# Altium PCB Layout.PcbDoc
Units mm, origin at the board's own origin, x right, y up, seen from the top; angles counter-clockwise.
Board outline 47 x 66 mm, 4 copper layers (Top Layer, Ground Layer, Power Layer, Bottom Layer), stack 1.591 mm thick; 60 components, 39 nets, 195 pads, 68 vias.
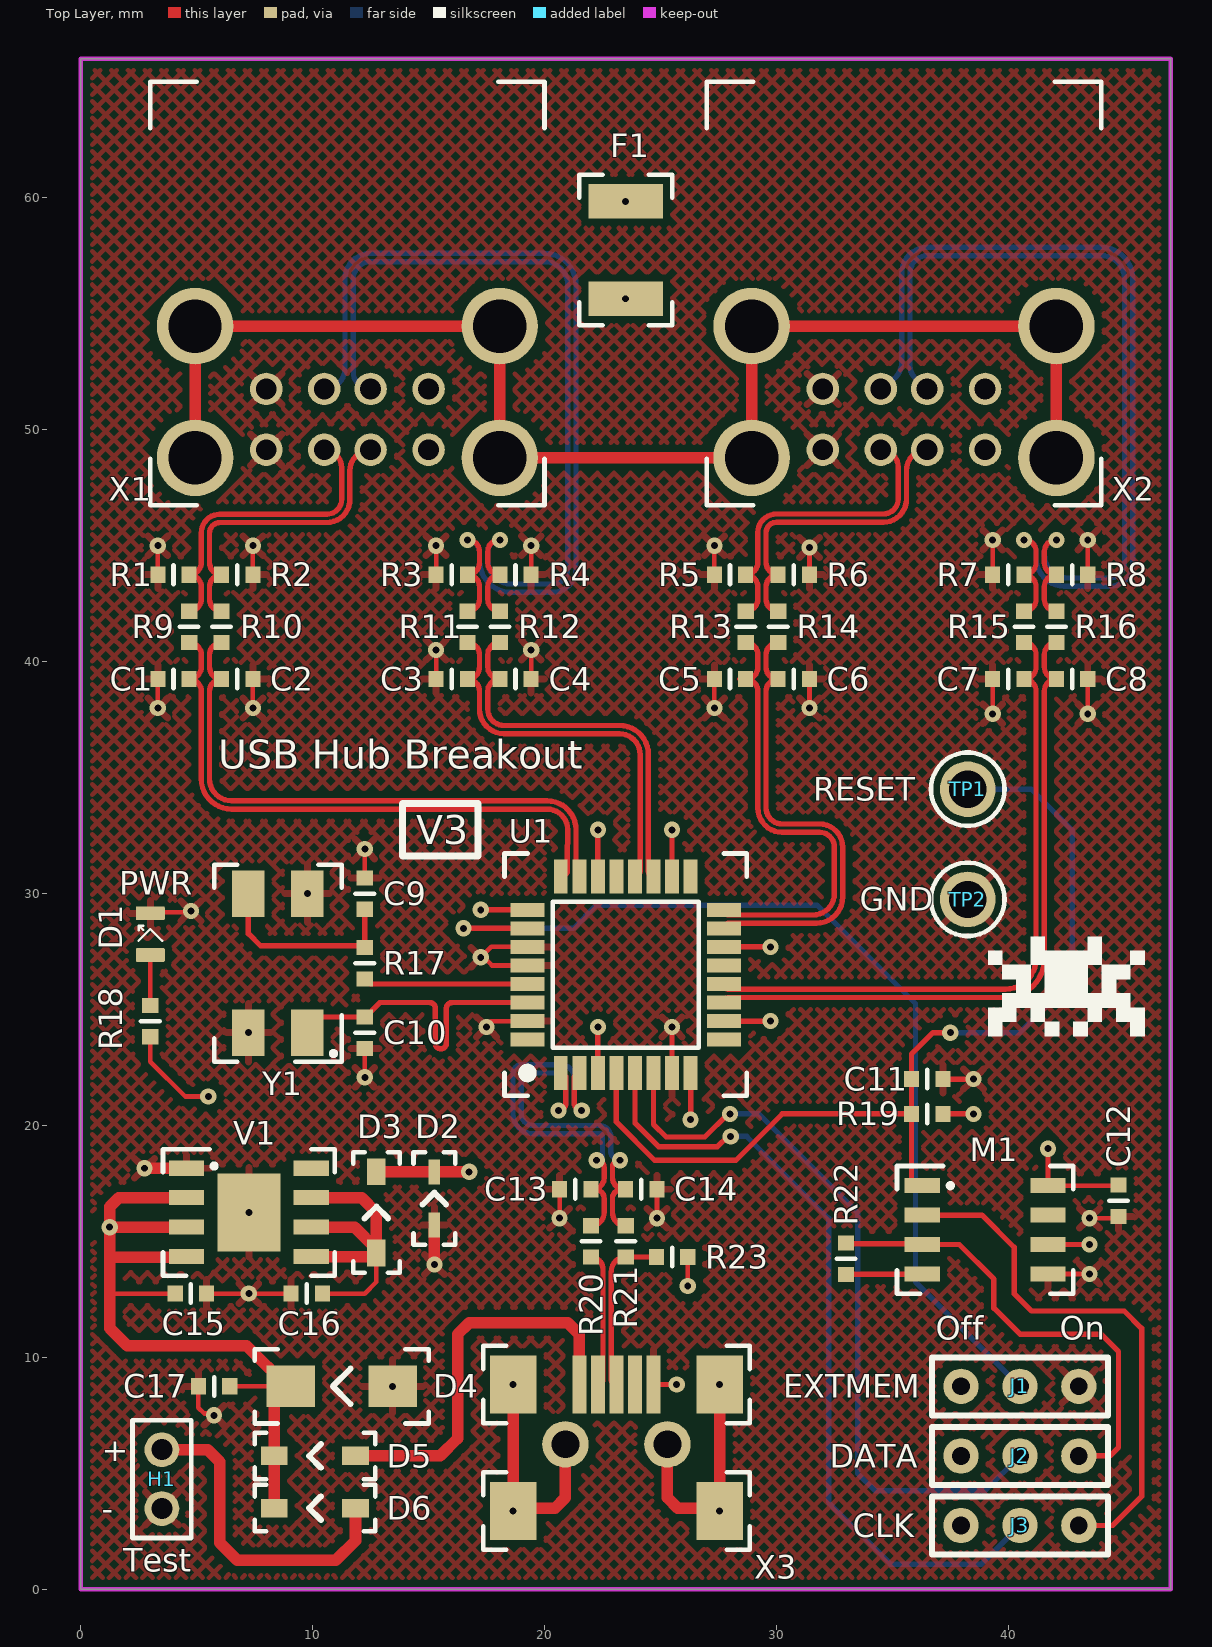
[diagram p0: Top Layer view]
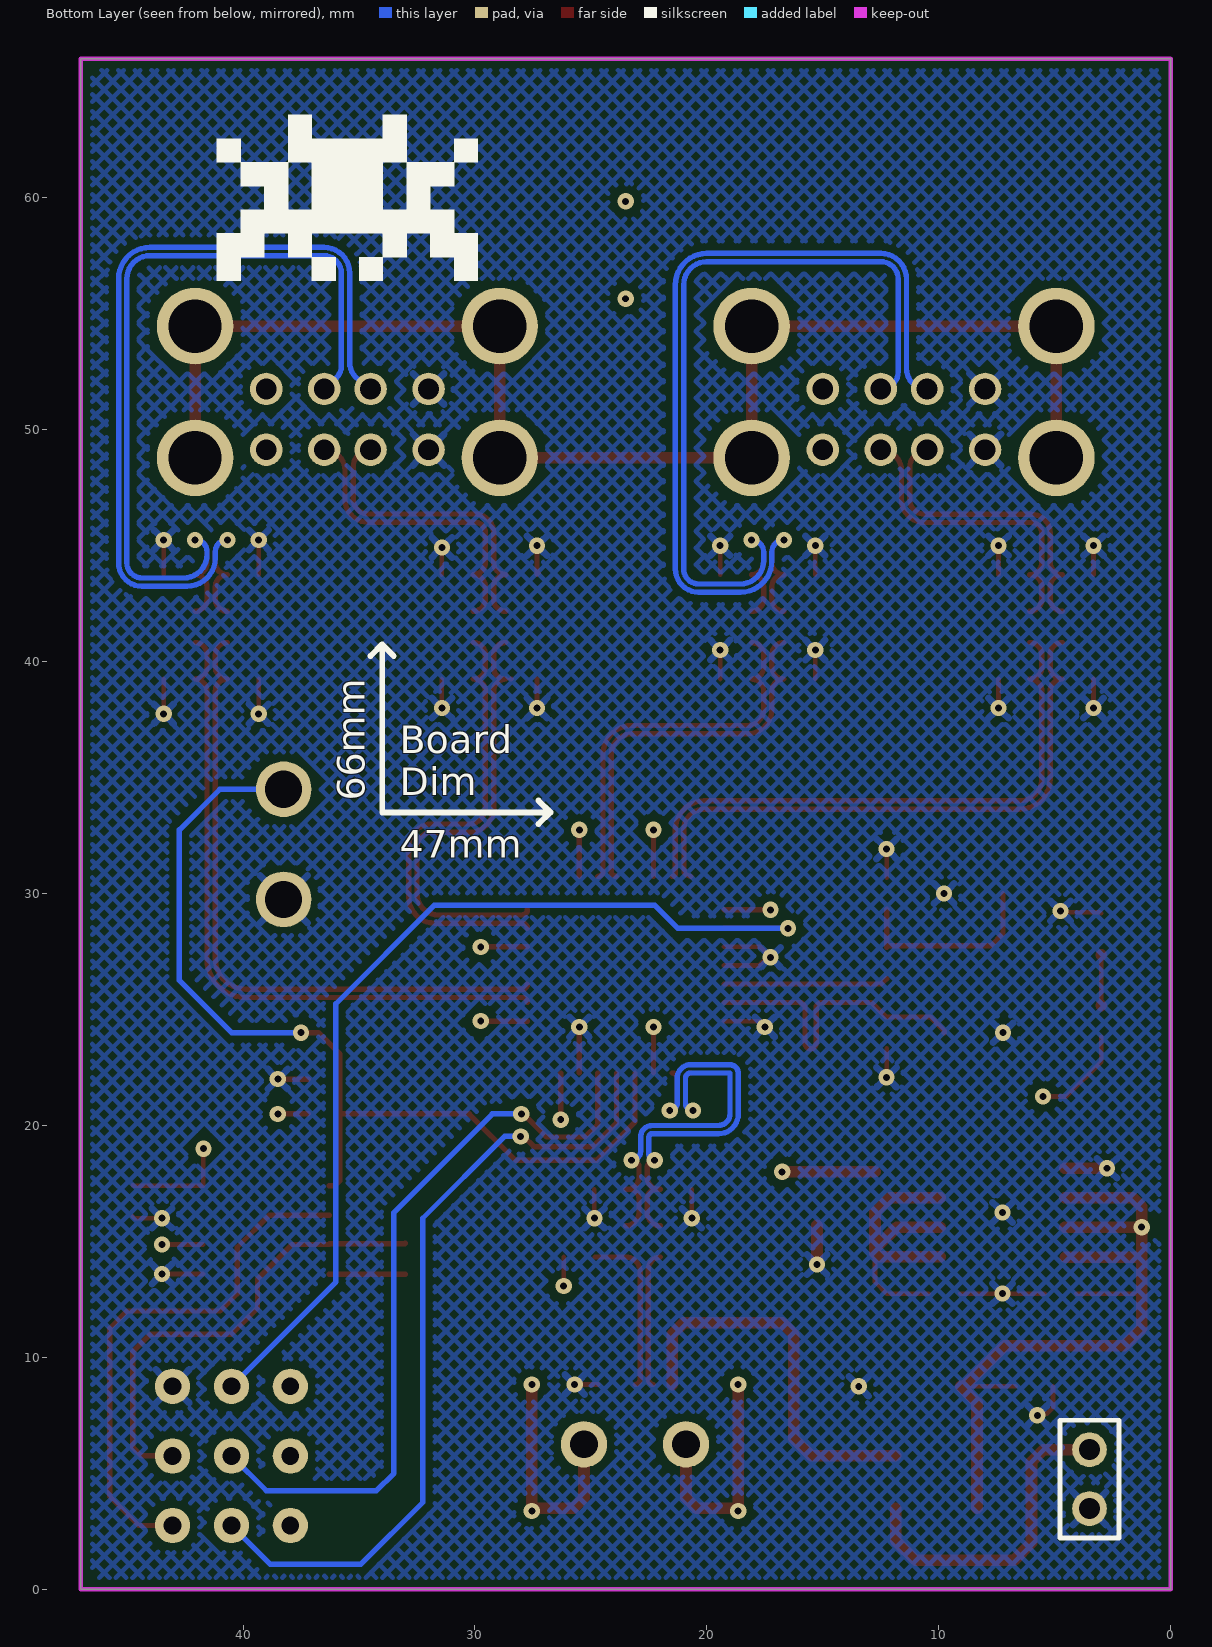
[diagram p1: Bottom Layer view, seen from below]
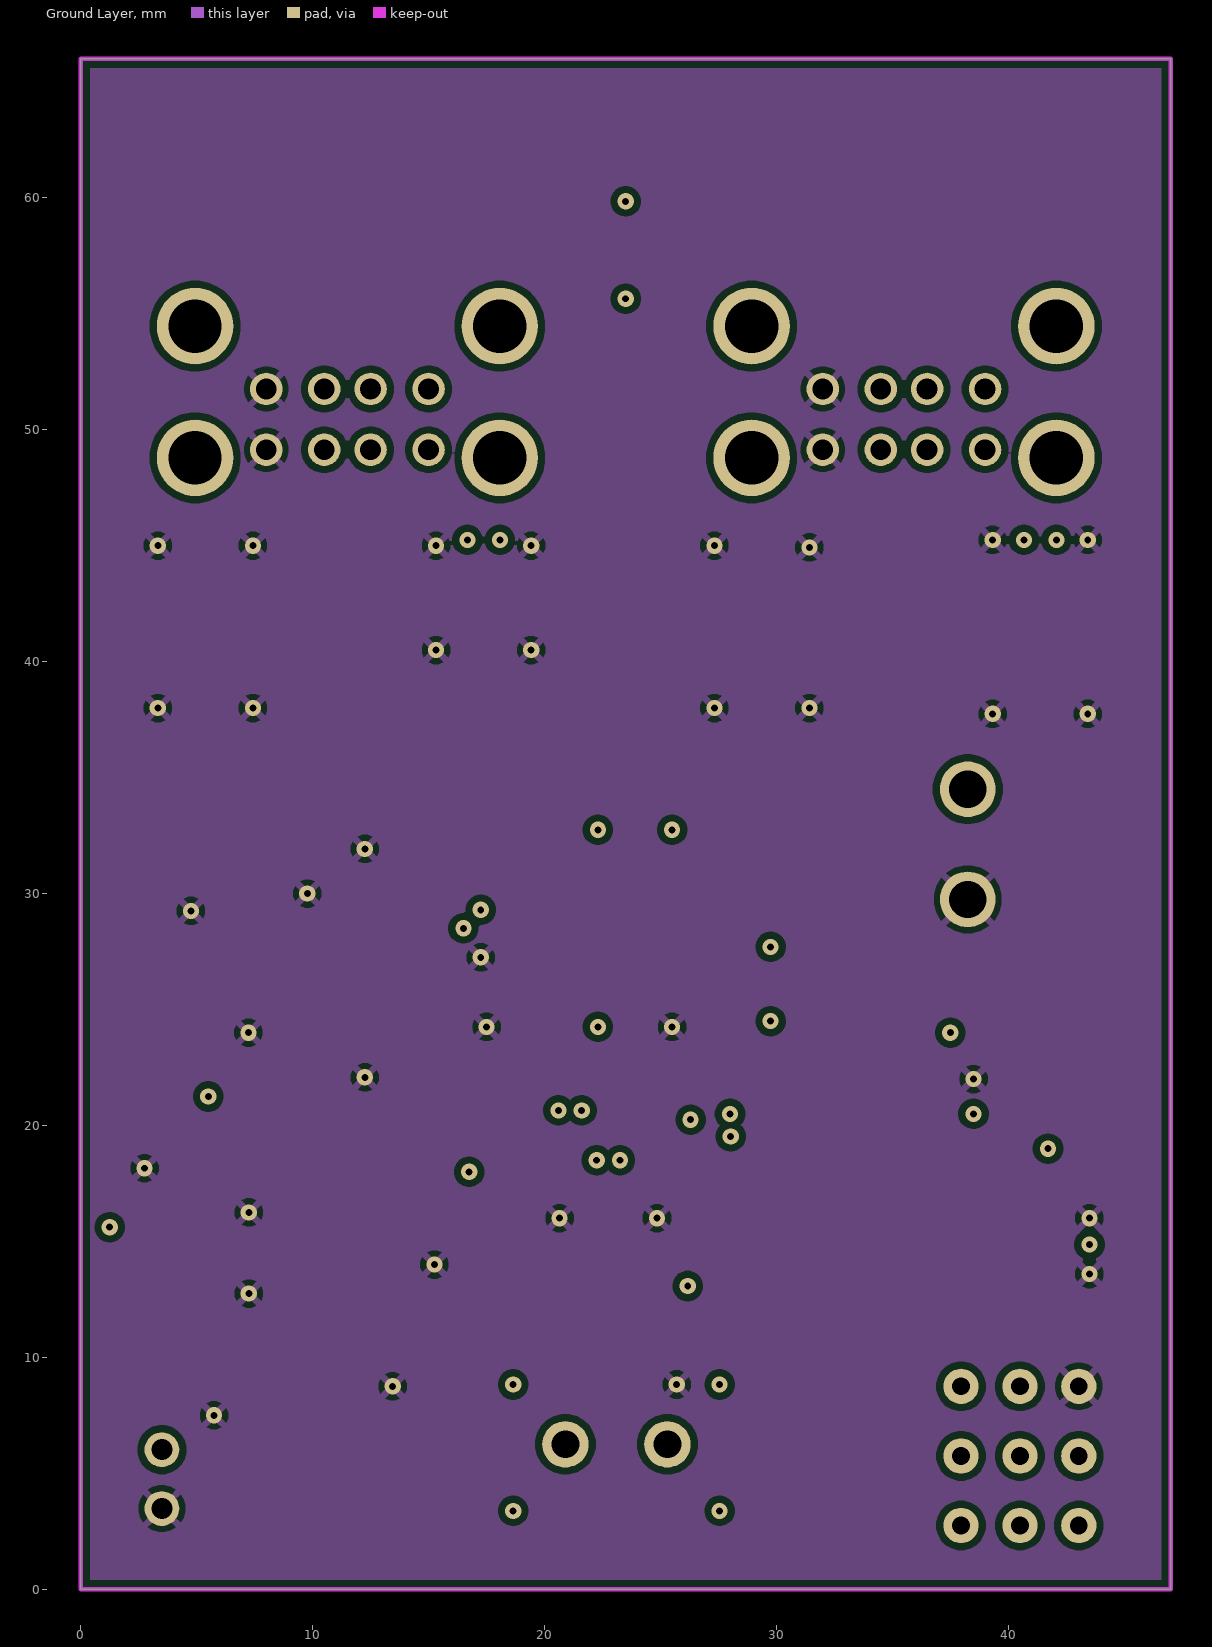
[diagram p2: Ground Layer]
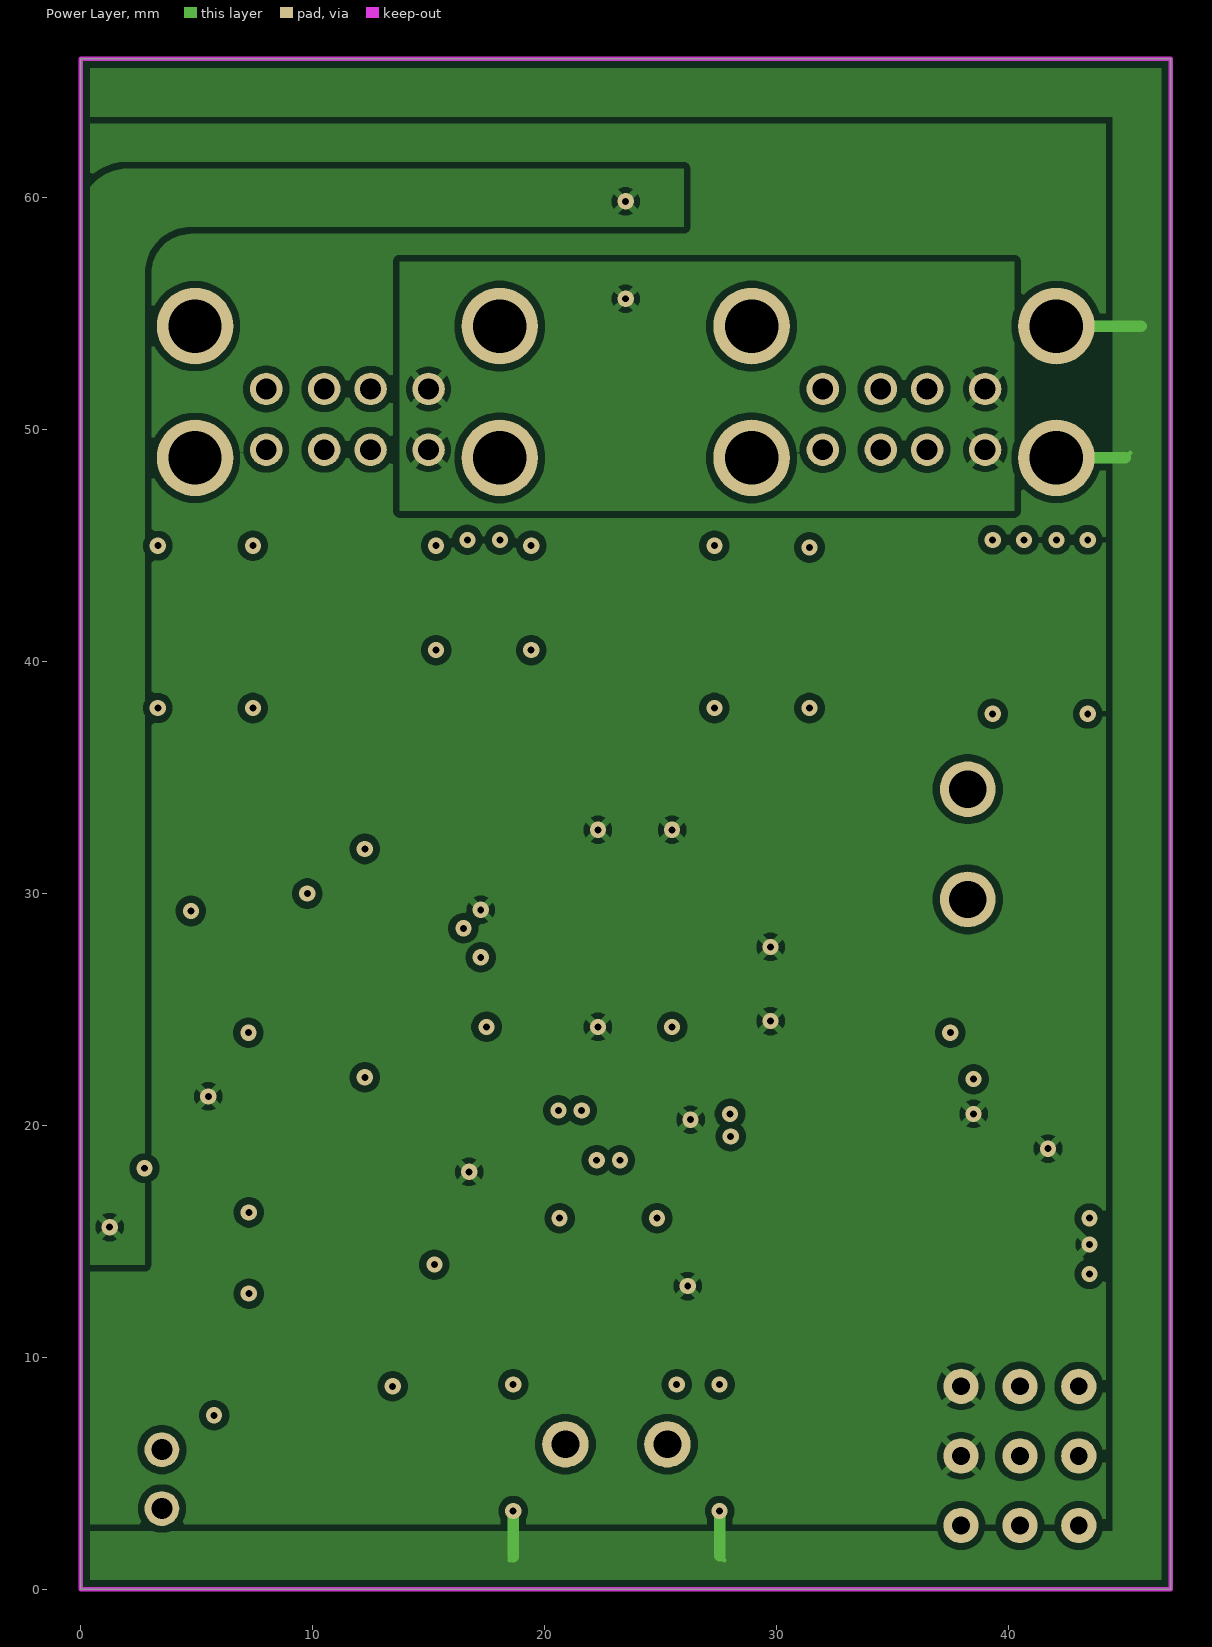
[diagram p3: Power Layer]
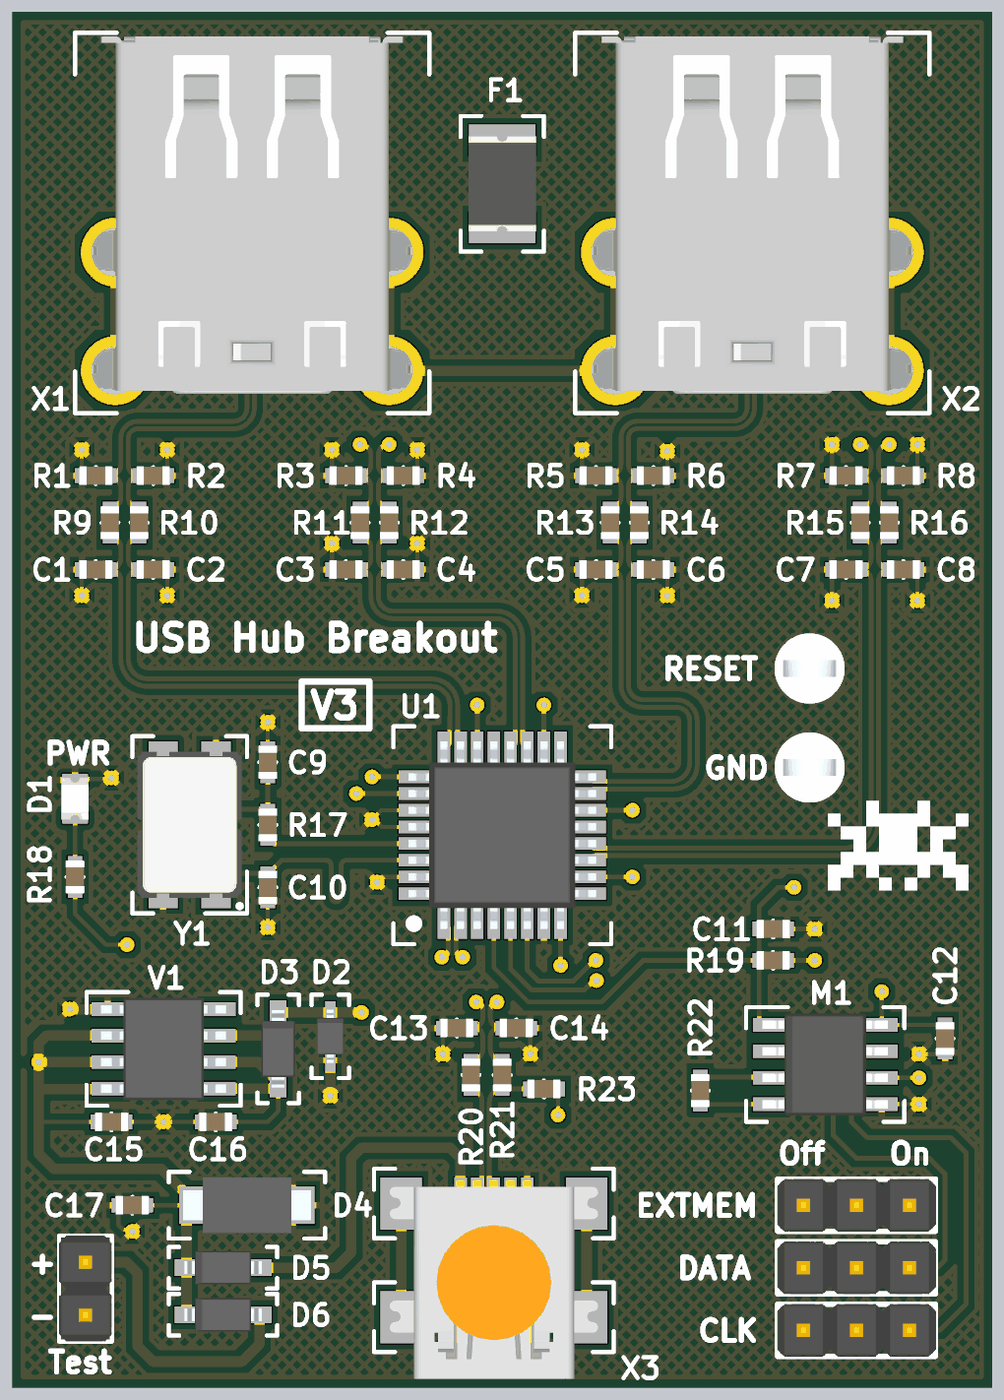
[diagram p4: 3D render of the assembled board from above, using the file's embedded part models]

## Layer stack, top to bottom
Top Solder: solder mask 0.0102, Solder Resist, Dk 3.8
Top Layer: signal copper 0.035
Dielectric 2: prepreg 0.2104, 7628*1, Dk 4.4
Ground Layer: signal copper 0.0175
Dielectric 1: dielectric 1.065, FR-4, Dk 4.8
Power Layer: signal copper 0.0175
Dielectric 3: prepreg 0.2104, 7628*1, Dk 4.4
Bottom Layer: signal copper 0.035
Bottom Solder: solder mask 0.0102, Solder Resist, Dk 3.8

## Board outline
0,0 47,0 47,66 0,66

## Design rules (kind name [scope] priority, off if disabled: settings)
BoardOutlineClearance [All] p1: gap=0.2 ignorepadtopadclearanceinfootprint=FALSE
Clearance "inPolygon Clearance" [InPolygon] p1: gap=0.3 ignorepadtopadclearanceinfootprint=TRUE // this rule ensures that every net within a polygon of a different net has a set clearance from the poly
Clearance "High Current Polygon Clearance" [(InPolygon AND InNetClass('High_Current_Nets'))] p2: gap=0 ignorepadtopadclearanceinfootprint=TRUE // this rule ensures that every net within a polygon of a different net has a set clearance from the poly
Clearance "Different Diff Pair" [All] p3: gap=0.2 ignorepadtopadclearanceinfootprint=TRUE
Clearance "Same Diff Pair" [All] p4: gap=0.1 ignorepadtopadclearanceinfootprint=TRUE
Clearance "Different Nets" [not InAnyDifferentialPair] p5: gap=0.3 ignorepadtopadclearanceinfootprint=TRUE except(0.1: Arc-SMDPad Arc-THPad Arc-Via Arc-Text Track-SMDPad Track-THPad Track-Via Track-Text SMDPad-Text THPad-Text Via-Text Fill-Text Poly-Text Region-Text Text-Text; 0.12: Arc-Arc Arc-Track Track-Track; 0.15: SMDPad-SMDPad SMDPad-THPad SMDPad-Via THPad-THPad THPad-Via Via-Via; 0.2: Arc-Hole Track-Hole SMDPad-Hole THPad-Hole Via-Hole Fill-Hole Poly-Hole Region-Hole Text-Hole)
Clearance "Same Net" [not InAnyDifferentialPair] p6: gap=0 ignorepadtopadclearanceinfootprint=TRUE except(0.1: THPad-Via; 0.18: Arc-Arc Arc-Track Track-Track)
ComponentClearance [All] p1: gap=0.102 collisioncheckmode=3 verticalgap=0.102 showdistances=TRUE
DiffPairsRouting "Ethernet Routing" [InDifferentialPairClass('Ethernet_Pairs')] p1: maxlimit=0.25 minlimit=0.2 mostfreqgap=0.25 toplayer_maxgap=0.2 toplayer_prefgap=0.2 toplayer_minwidth=0.25 toplayer_maxwidth=0.25 toplayer_prefwidth=0.25 midlayer1_mingap=0.25 midlayer1_minwidth=0.19 midlayer1_maxwidth=0.19 midlayer1_prefwidth=0.19 midlayer2_mingap=0.25 midlayer2_minwidth=0.19 midlayer2_maxwidth=0.19 midlayer2_prefwidth=0.19 bottomlayer_maxgap=0.2 bottomlayer_prefgap=0.2 bottomlayer_minwidth=0.25 bottomlayer_maxwidth=0.25 bottomlayer_prefwidth=0.25 impedanceprofiledriven=TRUE maxuncoupledlength=12.7
DiffPairsRouting "USB Routing" [InDifferentialPairClass('USB_Pairs')] p2: maxlimit=0.291 minlimit=0.127 mostfreqgap=0.291 toplayer_maxgap=0.127 toplayer_prefgap=0.127 toplayer_minwidth=0.23 toplayer_maxwidth=0.23 toplayer_prefwidth=0.23 midlayer1_mingap=0.291 midlayer1_minwidth=0.25 midlayer1_maxwidth=0.25 midlayer1_prefwidth=0.25 midlayer2_mingap=0.291 midlayer2_minwidth=0.25 midlayer2_maxwidth=0.25 midlayer2_prefwidth=0.25 bottomlayer_maxgap=0.127 bottomlayer_prefgap=0.127 bottomlayer_minwidth=0.23 bottomlayer_maxwidth=0.23 bottomlayer_prefwidth=0.23 impedanceprofiledriven=TRUE impedanceprofileid={EF04B2D6-B03C-408D-9AAA-76A713423C1B} impedanceprofilevalue=90.000000 maxuncoupledlength=12.7
DiffPairsRouting "CAN Routing" [InDifferentialPairClass('CAN_Pairs')] p3: maxlimit=0.907 minlimit=0.5 mostfreqgap=0.907 toplayer_maxgap=0.5 toplayer_prefgap=0.5 toplayer_minwidth=0.201 toplayer_maxwidth=0.201 toplayer_prefwidth=0.201 midlayer1_mingap=0.907 midlayer1_minwidth=0.155 midlayer1_maxwidth=0.155 midlayer1_prefwidth=0.155 midlayer2_mingap=0.907 midlayer2_minwidth=0.155 midlayer2_maxwidth=0.155 midlayer2_prefwidth=0.155 bottomlayer_maxgap=0.5 bottomlayer_prefgap=0.5 bottomlayer_minwidth=0.201 bottomlayer_maxwidth=0.201 bottomlayer_prefwidth=0.201 impedanceprofiledriven=TRUE maxuncoupledlength=12.7
Height [All] p1: minheight=0 maxheight=1816.048 prefheight=12.7
HoleSize [All] p1: absolutevalues=TRUE maxlimit=6.3 minlimit=0.3 maxpercent=80.000 minpercent=20.000
HoleToHoleClearance [All] p1: gap=0.25 allowstackedmicrovias=FALSE
MatchedLengths "XTAL Nets Matched Delays" [InNetClass('XTAL_Nets')] p1: tolerance=25.4 checknetsindiffpair=FALSE checkdiffpairvsdiffpair=TRUE checkxsignals=TRUE checkothers=TRUE usedelayunits=TRUE delaytolerance=10.000000
MatchedLengths "Diff Pair Matched Delays" [InDifferentialPairClass('Ethernet_Pairs') or InDifferentialPairClass('USB_Pairs') or InDifferentialPairClass('CAN_Pairs')] p2: tolerance=5 checknetsindiffpair=TRUE checkdiffpairvsdiffpair=FALSE checkxsignals=FALSE checkothers=FALSE usedelayunits=TRUE delaytolerance=100.000000 phasematching=TRUE phasedelaytolerance=5.000000 phasedistance=12.7
MinimumAnnularRing [All] p1: minimumring=0.2
MinimumSolderMaskSliver [All] p1: minsoldermaskwidth=0
PlaneClearance "Supply Net Clearance" [InNetClass('Supply_Nets')] p1: clearance=0.5
PlaneClearance "All Nets" [All] p2: clearance=0.3
PolygonConnect "High Current" [InNetClass('High_Current_Nets')] p1: thpad.connectstyle=Relief thpad.reliefconductorwidth=0.4 thpad.reliefentries=4 thpad.polygonreliefangle="90 Angle" thpad.airgapwidth=0.1 thpad.conductorbypadedge=TRUE thpad.mindistance=0.381 thpad.enablemindistance=FALSE smdpad.connectstyle=Direct smdpad.reliefconductorwidth=0.254 smdpad.reliefentries=4 smdpad.polygonreliefangle="90 Angle" smdpad.airgapwidth=0.254 via.connectstyle=Direct via.reliefconductorwidth=0.254 via.reliefentries=4 via.polygonreliefangle="90 Angle" via.airgapwidth=0.254
PolygonConnect "Supply Nets" [InNetClass('Supply_Nets')] p2: connectstyle=Relief reliefconductorwidth=0.3 reliefentries=4 polygonreliefangle="90 Angle" conductorbypadedge=TRUE mindistance=0.381 enablemindistance=FALSE airgapwidth=0.254
PolygonConnect General [All] p3: connectstyle=Relief reliefconductorwidth=0.254 reliefentries=4 polygonreliefangle="90 Angle" airgapwidth=0.254
RoutingVias [All] p1: holewidth=0.2 width=0.35 viastyle="Through Hole" minholewidth=0.15 minwidth=0.3 maxholewidth=6.3 maxwidth=6.55
SilkToSilkClearance [All] p1: silktosilkclearance=0
SilkToSolderMaskClearance [All] p1: minsilkscreentomaskgap=0 clearancetoexposedcopper=TRUE
SolderMaskExpansion [All] p1: expansion=0.075 istentingtop=FALSE
SupplyNets "Schematic Supply Nets_6" [InNet('+5V_Fused')] p1: voltage=0.000
SupplyNets "Schematic Supply Nets_5" [InNet('+3V3')] p2: voltage=0.000
SupplyNets "Schematic Supply Nets_4" [InNet('USBVCC')] p3: voltage=0.000
SupplyNets "Schematic Supply Nets_2" [InNet('+5V')] p4: voltage=0.000
SupplyNets "Schematic Supply Nets" [InNet('AUXVCC')] p5: voltage=0.000
SupplyNets "Schematic Supply Nets_3" [InNet('GND')] p6: voltage=0.000
SupplyNets "Schematic Supply Nets_1" [InNet('Earth')] p7: voltage=0.000
UnRoutedNet [All] p1: checkbadconnections=TRUE
Width "nRF Width" [InNetClass('nRF Signal')] p1: maxlimit=0.379 minlimit=0.263 preferedwidth=0.379 toplayer_minwidth=0.379 midlayer1_maxwidth=0.263 midlayer1_prefwidth=0.263 midlayer2_maxwidth=0.263 midlayer2_prefwidth=0.263 bottomlayer_minwidth=0.379 impedanceprofiledriven=TRUE minimp=50.000000 maximp=50.000000 favimp=50.000000 checkconnectedcopper=TRUE
Width [All] p2: maxlimit=100 minlimit=0.1 preferedwidth=0.2
20 further rules are at their usual default settings.

## Classes and differential pairs
differential pair class USB_Pairs: USB0_D USB0_DX USB1_D USB1_DX USB2_D USB2_DX USB3_D USB3_DX USB4_D USB4_DX
net class Supply_Nets: +3V3 +5V +5V_Fused AUXVCC GND NetC16_2 USBVCC
component class "USB Hub": C1 C2 C3 C4 C5 C6 C7 C8 C9 C10 C11 C12 C13 C14 J1 J2 J3 M1 R1 R2 R3 R4 R5 R6 R7 R8 R9 R10 R11 R12 R13 R14 R15 R16 R17 R19 R20 R21 R22 R23 TP1 TP2 U1 Y1
component class Power: C15 C16 C17 D1 D2 D3 D4 D5 D6 F1 R18 V1
component class Connectors: H1 X1 X2 X3
differential pair USB4_DX: +USB4_DX_P -USB4_DX_N
differential pair USB4_D: +USB4_D_P -USB4_D_N
differential pair USB3_DX: +USB3_DX_P -USB3_DX_N
differential pair USB3_D: +USB3_D_P -USB3_D_N
differential pair USB2_DX: +USB2_DX_P -USB2_DX_N
differential pair USB2_D: +USB2_D_P -USB2_D_N
differential pair USB1_DX: +USB1_DX_P -USB1_DX_N
differential pair USB1_D: +USB1_D_P -USB1_D_N
differential pair USB0_DX: +USB0_DX_P -USB0_DX_N
differential pair USB0_D: +USB0_D_P -USB0_D_N

## Components (designator, comment, footprint, x,y, rotation, side; value= is the part's Value field where it differs from the comment)
C1 "[Cap] 0603 22pF 5% 50V" "[Cap] SMD 0603" 4,39.25 r0 top (schematic designator C5)
C2 "[Cap] 0603 22pF 5% 50V" "[Cap] SMD 0603" 6.75,39.25 r180 top (schematic designator C4)
C3 "[Cap] 0603 22pF 5% 50V" "[Cap] SMD 0603" 16,39.25 r0 top (schematic designator C7)
C4 "[Cap] 0603 22pF 5% 50V" "[Cap] SMD 0603" 18.75,39.25 r180 top (schematic designator C6)
C5 "[Cap] 0603 22pF 5% 50V" "[Cap] SMD 0603" 28,39.25 r0 top (schematic designator C9)
C6 "[Cap] 0603 22pF 5% 50V" "[Cap] SMD 0603" 30.75,39.25 r180 top (schematic designator C8)
C7 "[Cap] 0603 22pF 5% 50V" "[Cap] SMD 0603" 40,39.25 r0 top (schematic designator C11)
C8 "[Cap] 0603 22pF 5% 50V" "[Cap] SMD 0603" 42.75,39.25 r180 top (schematic designator C10)
C9 "[Cap] 0603 27pF 1% 50V" "[Cap] SMD 0603" 12.25,30 r270 top (schematic designator C13)
C10 "[Cap] 0603 27pF 1% 50V" "[Cap] SMD 0603" 12.25,24 r90 top (schematic designator C12)
C11 "[Cap] 0603 0.1uF 10% 50V" "[Cap] SMD 0603" 36.5,22 r180 top (schematic designator C14)
C12 "[Cap] 0603 0.1uF 10% 50V" "[Cap] SMD 0603" 44.75,16.75 r90 top (schematic designator C15)
C13 "[Cap] 0603 22pF 5% 50V" "[Cap] SMD 0603" 21.325,17.25 r0 top (schematic designator C2)
C14 "[Cap] 0603 22pF 5% 50V" "[Cap] SMD 0603" 24.175,17.25 r180 top (schematic designator C3)
C15 "[Cap] 0603 10uF 10% 10V" "[Cap] SMD 0603" 4.75,12.75 r180 top (schematic designator C16)
C16 "[Cap] 0603 10uF 10% 10V" "[Cap] SMD 0603" 9.75,12.75 r0 top (schematic designator C17)
C17 "[Cap] 0603 0.1uF 10% 50V" "[Cap] SMD 0603" 5.75,8.75 r0 top (schematic designator C1)
D1 "[LED] SMD 0805 Green" "[LED] SMD 0805" 3,28.25 r90 top (schematic designator D6)
D2 "SOD-323" "[Diode] SOD-323" 15.25,16.85 r90 top (schematic designator D5)
D3 "SOD123" "[Diode] SMD SOD-123" 12.75,16.25 r90 top (schematic designator D4)
D4 "DO-214AC" "[Diode] SMD DO-214AC" 11.25,8.75 r180 top (schematic designator D2)
D5 "SOD123" "[Diode] SMD SOD-123" 10.099,5.75 r180 top (schematic designator D3)
D6 "SOD123" "[Diode] SMD SOD-123" 10.099,3.5 r180 top (schematic designator D1)
F1 "[PTC] SMD 1812 500mA" "[PTC] SMD 1812" 23.5,57.75 r270 top
H1 "1x2 Header" "[Header] 1x2 Male" 3.5,4.75 r270 top
J1 "[Jumper] Thru-Hole 3pin" "[Jumper] Thru-Hole 3pin" 40.5,8.75 r180 top (schematic designator J3)
J2 "[Jumper] Thru-Hole 3pin" "[Jumper] Thru-Hole 3pin" 40.5,5.75 r180 top
J3 "[Jumper] Thru-Hole 3pin" "[Jumper] Thru-Hole 3pin" 40.5,2.75 r180 top (schematic designator J1)
M1 "[Flash] 32x16b" "[Flash] 32x16b" 39,15.5 r0 top
R1 "[15k] SMD 0603 1% 1/8W" "[Res] SMD 0603" 4,43.75 r0 top (schematic designator R7)
R2 "[15k] SMD 0603 1% 1/8W" "[Res] SMD 0603" 6.75,43.75 r180 top (schematic designator R6)
R3 "[15k] SMD 0603 1% 1/8W" "[Res] SMD 0603" 16,43.75 r0 top (schematic designator R11)
R4 "[15k] SMD 0603 1% 1/8W" "[Res] SMD 0603" 18.75,43.75 r180 top (schematic designator R10)
R5 "[15k] SMD 0603 1% 1/8W" "[Res] SMD 0603" 28,43.75 r0 top (schematic designator R17)
R6 "[15k] SMD 0603 1% 1/8W" "[Res] SMD 0603" 30.75,43.75 r180 top (schematic designator R16)
R7 "[15k] SMD 0603 1% 1/8W" "[Res] SMD 0603" 40,43.75 r0 top (schematic designator R19)
R8 "[15k] SMD 0603 1% 1/8W" "[Res] SMD 0603" 42.75,43.75 r180 top (schematic designator R18)
R9 "[27] SMD 0603 1% 1/10W" "[Res] SMD 0603" 4.675,41.5 r90 top (schematic designator R4)
R10 "[27] SMD 0603 1% 1/10W" "[Res] SMD 0603" 6.075,41.5 r90 top (schematic designator R5)
R11 "[27] SMD 0603 1% 1/10W" "[Res] SMD 0603" 16.675,41.5 r90 top (schematic designator R8)
R12 "[27] SMD 0603 1% 1/10W" "[Res] SMD 0603" 18.075,41.5 r90 top (schematic designator R9)
R13 "[27] SMD 0603 1% 1/10W" "[Res] SMD 0603" 28.675,41.5 r90 top (schematic designator R12)
R14 "[27] SMD 0603 1% 1/10W" "[Res] SMD 0603" 30.075,41.5 r90 top
R15 "[27] SMD 0603 1% 1/10W" "[Res] SMD 0603" 40.675,41.5 r90 top (schematic designator R13)
R16 "[27] SMD 0603 1% 1/10W" "[Res] SMD 0603" 42.075,41.5 r90 top (schematic designator R15)
R17 "[1k] SMD 0603 1% 1/10W" "[Res] SMD 0603" 12.25,27 r270 top (schematic designator R20)
R18 "[220] SMD 0603 5% 1/10W" "[Res] SMD 0603" 3,24.5 r90 top (schematic designator R23)
R19 "[47k] SMD 0603 1% 1/10W" "[Res] SMD 0603" 36.5,20.5 r180 top (schematic designator R21)
R20 "[27] SMD 0603 1% 1/10W" "[Res] SMD 0603" 22,15 r90 top (schematic designator R3)
R21 "[27] SMD 0603 1% 1/10W" "[Res] SMD 0603" 23.5,15 r90 top (schematic designator R2)
R22 "[1k] SMD 0603 1% 1/10W" "[Res] SMD 0603" 33,14.25 r90 top
R23 "[1.5k] SMD 0603 1% 1/10W" "[Res] SMD 0603" 25.5,14.325 r0 top (schematic designator R1)
TP1 "[THM] Thru-Hole" "[THM] White" 38.25,34.5 r0 top
TP2 "[THM] Thru-Hole" "[THM] White" 38.25,29.75 r0 top
U1 "4port" "[USB Hub] USB2.0 4port" 23.5,26.5 r90 top
V1 "3V3 1.5A" "[Linear] 3V3 1.5A" 7.25,16.25 r0 top
X1 "USB-A" "[USB] Type-A Dual" 11.5,64.75 r180 top (schematic designator X2)
X2 "USB-A" "[USB] Type-A Dual" 35.5,64.75 r180 top (schematic designator X3)
X3 "[USB] Type-B Mini" "[USB] Type-B Mini" 23.1,5 r0 top (schematic designator X1)
Y1 "[Crystal] SMD 6MHz" "[Crystal] SMD 6MHz" 8.5,27 r270 top

## Footprints (in the part's own frame and the unit in brackets; to place one, negate y for a bottom-side part, rotate by r counter-clockwise, add the part's x,y. Pads: shape width x height; smd on the part's side, far side on the other; paste and mask are expansions set on the pad)
"[Cap] SMD 0603" [mm]
  rect 0.65x0.7 smd: 1(-0.675,0) 2(0.675,0)
  silkscreen extent 0,-0.4 0,0.4, body extent -0.8,-0.45 0.8,0.45, height 0.8
"[Crystal] SMD 6MHz" [mm] "ECS-060-18-20BM-JEN-TR"
  rect 2x1.4 smd: 1(3,1.27) 2(-3,1.27) 3(-3,-1.27) 4(3,-1.27)
  silkscreen extent -4.25,-2.75 4.25,2.75, body extent -3.5,-2.5 3.5,2.5, height 1.3
"[Diode] SMD DO-214AC" [mm]
  rect 2.1x1.8 smd: 1(2.2,0) 2(-2.2,0)
  silkscreen extent -3.75,-1.6 3.75,1.6, body extent -3.07,-1.33 3.07,1.33, height 2.39
"[Diode] SMD SOD-123" [mm]
  rect 1.15x0.8 smd: 1(1.75,0) 2(-1.75,0)
  silkscreen extent -2.6,-1 2.6,1, body extent -1.85,-0.8 1.86,0.8, height 1.35
"[Diode] SOD-323" [mm]
  rect 1.075x0.5 smd: 1(1.15,0) 2(-1.15,0)
  silkscreen extent -2,-0.9 2,0.9, body extent -1.27,-0.65 1.27,0.65, height 1.14
"[Flash] 32x16b" [mm]
  rect 1.528x0.65 smd: 1(-2.711,1.905) 2(-2.711,0.635) 3(-2.711,-0.635) 4(-2.711,-1.905) 5(2.711,-1.905) 6(2.711,-0.635) 7(2.711,0.635) 8(2.711,1.905)
  silkscreen extent -3.8,-2.75 3.8,2.75, body extent -3.01,-2.45 3.01,2.45, height 1.63
"[Header] 1x2 Male" [mm]
  round 1.5 hole 0.9: 1(-1.27,0) 2(1.27,0)
  silkscreen extent -2.54,-1.27 2.54,1.27, body extent -2.54,-1.27 2.54,1.27, height 9.5
"[Jumper] Thru-Hole 3pin" [mil]
  round 60 hole 30: 1(-100,0) 2(0,0) 3(100,0)
  silkscreen extent -149,-49 149,49, body extent -150,-50 150,50, height 374
"[LED] SMD 0805" [mm]
  rrect20% 0.6x1.25 smd: 1(-0.9,0) 2(0.9,0)
  silkscreen extent -0.28,-0.51 0.37,0.51, body extent -1,-0.65 1,0.65, height 0.8
"[Linear] 3V3 1.5A" [mm]
  rect 1.525x0.65 smd: 1(-2.688,1.905) 2(-2.688,0.635) 3(-2.688,-0.635) 4(-2.688,-1.905) 5(2.688,-1.905) 6(2.688,-0.635) 7(2.688,0.635) 8(2.688,1.905)
  rect 2.71x3.35 smd: 9(0,0)
  silkscreen extent -3.7,-2.73 3.7,2.73, body extent -3,-2.45 3,2.45, height 1.5
"[PTC] SMD 1812" [mm]
  rect 1.5x3.2 smd: 1(-2.1,0) 2(2.1,0)
  silkscreen extent -3.25,-2 3.25,2, body extent -2.27,-1.62 2.27,1.62, height 1.1
"[Res] SMD 0603" [mm]
  rect 0.65x0.7 smd: 1(-0.675,0) 2(0.675,0)
  silkscreen extent 0,-0.4 0,0.4, body extent -0.8,-0.45 0.8,0.45, height 0.8
"[THM] White" [mm] "5012"
  round 2.4 hole 1.6: 1(0,0)
  silkscreen extent -1.59,-1.58 1.59,1.58, body extent -1.58,-1.59 1.58,1.59, height 8.12
"[USB Hub] USB2.0 4port" [mm]
  rect 1.475x0.6 smd: 1(-4.238,2.8) 2(-4.238,2) 3(-4.238,1.2) 4(-4.238,0.4) 5(-4.238,-0.4) 6(-4.238,-1.2) 7(-4.238,-2) 8(-4.238,-2.8) 17(4.238,-2.8) 18(4.238,-2) 19(4.238,-1.2) 20(4.238,-0.4) 21(4.238,0.4) 22(4.238,1.2) 23(4.238,2) 24(4.238,2.8)
  rect 0.6x1.475 smd: 9(-2.8,-4.238) 10(-2,-4.238) 11(-1.2,-4.238) 12(-0.4,-4.238) 13(0.4,-4.238) 14(1.2,-4.238) 15(2,-4.238) 16(2.8,-4.238) 25(2.8,4.238) 26(2,4.238) 27(1.2,4.238) 28(0.4,4.238) 29(-0.4,4.238) 30(-1.2,4.238) 31(-2,4.238) 32(-2.8,4.238)
  silkscreen extent -5.22,-5.22 5.23,5.23, body extent -4.5,-4.5 4.5,4.5, height 1.6
"[USB] Type-A Dual" [mm] "61400826021"
  round 1.4 hole 0.9: 1(-3.5,15.61) 2(-1,15.61) 3(1,15.61) 4(3.5,15.61) 5(-3.5,12.99) 6(-1,12.99) 7(1,12.99) 8(3.5,12.99)
  round 3.3 hole 2.3: MH(-6.57,10.28) MH(-6.57,15.96) MH(6.57,10.28) MH(6.57,15.96)
  silkscreen extent -8.5,-0.25 8.5,18, body extent -7.91,-0.08 7.91,17.07, height 16.19
"[USB] Type-B Mini" [mm] "MUSB-05-S-B-SM-A-K-TR"
  rect 0.6x2.5 smd: 1(-1.6,3.83) 2(-0.8,3.83) 3(0,3.83) 4(0.8,3.83) 5(1.6,3.83)
  rect 2x2.5 smd: MH(-4.45,-1.62) MH(-4.45,3.83) MH(4.45,-1.62) MH(4.45,3.83)
  round 2 hole 1.2: MH(-2.2,1.25) MH(2.2,1.25)
  silkscreen extent -5.75,-3.29 5.75,5.5, body extent -5,-4.57 5,4.93, height 4.12

## Part data
C1 C2 C3 C4 C5 C6 C7 C8 C13 C14: "CC0603JRNPO9BN240", Capacitance=22pF, Max Voltage=50V, Size Package=0603, Supplier Part Number 1=311-1062-1-ND, Tolerance=5%, Supplier 1=DigiKey
C9 C10: "0603N270F500CT", Capacitance=27pF, Max Voltage=50V, Size Package=0603, Supplier Part Number 1=1292-1510-1-ND, Tolerance=1%, Supplier 1=DigiKey
C11 C12 C17: "CL10B104KB8NNNC", Capacitance=100nF, Max Voltage=50V, Size Package=0603, Supplier Part Number 1=1276-1000-6-ND, Tolerance=10%, Supplier 1=DigiKey
C15 C16: "CL10A106KP8NNNC", Capacitance=10uF, Max Voltage=10V, Size Package=0603, Supplier Part Number 1=1276-1192-6-ND, Tolerance=10%, Supplier 1=DigiKey
D1: "LG R971-KN-1-0-20-R18", Color=Green, Size Package=0805, Supplier Part Number 1=475-LGR971-KN-1CT-ND, Supplier 1=DigiKey
D2: library part "[TVS] 3.3Vnom 19Vclamp_max", "CDSOD323-T03C", Optimal Zener Voltage=4V, Supplier Part Number 1=CDSOD323-T03CDKR-ND, Supplier 1=DigiKey, Wattage=350W
D3 D5 D6: library part "[Schottky] SMD 40V 1A", "B5819W-TP", Supplier Part Number 1=B5819W-TPMSCT-ND, Supplier 1=DigiKey
D4: library part "[Zener] SMD 5.6V 1W 5%", "SMAZ5V6-13-F", Optimal Zener Voltage=5.6V, Supplier Part Number 1=SMAZ5V6-FDICT-ND, Tolerance=5%, Supplier 1=DigiKey, Wattage=1W
F1: "MF-MSMF050-2", Size Package=1812, Supplier Part Number 1=MF-MSMF050-2DKR-ND, Trip Current=500mA, Supplier 1=DigiKey
H1: library part "[Header] 1x2 Male", "2.54mm pitch"
M1: "M93C46-WMN6TP", Supplier Part Number 1=497-5090-1-ND, Supplier 1=DigiKey
R1 R2 R3 R4 R5 R6 R7 R8: "CRCW060315K0FKEA", Resistance=15k, Size Package=0603, Supplier Part Number 1=541-15.0KHCT-ND, Tolerance=1%, Supplier 1=DigiKey, Wattage=1/8W
R9 R10 R11 R12 R13 R14 R15 R16 R20 R21: "MCT06030C2709FP500", Resistance=27, Size Package=0603, Supplier Part Number 1=749-1631-1-ND, Tolerance=1%, Supplier 1=DigiKey, Wattage=1/10W
R17 R22: "RMCF0603FT1K00", Resistance=1k, Size Package=0603, Supplier Part Number 1=RMCF0603FT1K00DKR-ND, Tolerance=1%, Supplier 1=DigiKey, Wattage=1/10W
R18: "RK73B1JTTD221J", Resistance=220, Size Package=0603, Supplier Part Number 1=2019-RK73B1JTTD221JDKR-ND, Tolerance=5%, Supplier 1=DigiKey, Wattage=1/8W
R19: "RC0603FR-0747KL", Resistance=47k, Size Package=0603, Supplier Part Number 1=311-47.0KHRDKR-ND, Tolerance=1%, Supplier 1=DigiKey, Wattage=1/10W
R23: "CR0603-FX-1501ELF", Resistance=1.5k, Size Package=0603, Supplier Part Number 1=118-CR0603-FX-1501ELFCT-ND, Tolerance=1%, Supplier 1=DigiKey, Wattage=1/10W
TP1 TP2: "5012", Supplier Part Number 1=36-5012-ND, Supplier 1=DigiKey
U1: library part "[USB Hub] USB 2.0 4port", "TUSB2046BVFR", Supplier Part Number 1=296-27131-1-ND, Supplier 1=DigiKey
V1: library part "[Linear] SMD 3V3 1.5A", "AP7362A-33SP-13", Supplier Part Number 1=AP7362A-33SP-13DICT-ND, Supplier 1=DigiKey
X1 X2: library part "[USB] Type-A Dual", "61400826021", Supplier Part Number 1=2092-KUSBX-AS2N-B-ND, Supplier 1=DigiKey
X3: "MUSB-05-S-B-SM-A-K-TR", Supplier Part Number 1=SAM14226CT-ND, Supplier 1=DigiKey
Y1: "ECS-060-18-20BM-JEN-TR", Supplier Part Number 1=XC2349DKR-ND, Supplier 1=DigiKey

## Via types
v1: diameter 0.7, hole 0.3, Top Layer to Bottom Layer, 68 vias

## Nets (pads, with @x,y where several pads share a name; then routed paths per layer and width w, separated by ;. In a path a pad name is that pad's centre, name@x,y a point inside that pad or via, vN(x,y) a via of type N, cw(c..) or ccw(c..) an arc to the next point about the centre after c; other vN are vias at no path point)
+3V3: C12.2 D2.1 D3.1 J1.3 J2.3 M1.6 M1.8 R18.1 R19.1 R23.2 U1.3 U1.8 U1.10 U1.14 U1.18 U1.22 U1.25 | length 31.3
  Top Layer w0.2: R18.1 3,22.75 4.5,21.25 v1(5.5,21.25) ; v1(26.175,13.075) R23.2 ; M1.6 v1(43.5,14.865) ; v1(41.711,19) M1.8 44.73,17.405 C12.2 C12.2@44.725,17.425
  Top Layer w0.23: v1(17.25,29.3) U1.25 ; U1.3 v1(22.3,24.25) ; U1.22 v1(22.3,32.75) ; U1.18 v1(25.5,32.75) ; v1(26.3,20.25) U1.8 ; U1.10 v1(29.75,24.5) ; U1.14 v1(29.75,27.7) ; R19.1 v1(38.5,20.5)
  Top Layer w0.5: D3.1 D2.1 v1(16.75,18)
+5V: C15.2 C17.2 D4.1 D5.1 D6.1 F1.1 V1.2 V1.3 V1.4 | length 34.9
  Top Layer w0.2: 1.25,12.75 C15.2 ; C17.2@6.675,8.75 D4.1
  Top Layer w0.5: V1.4@4.537,14.32 1.25,14.32 ; V1.3 v1(1.25,15.615) ; V1.2 1.635,16.885 1.25,16.5 v1(1.25,15.615) ; D6.1 D5.1 8.349,8.049 D4.1 8.9,8.75 7.15,10.5 2,10.5 1.25,11.25 1.25,12.75 1.25,14.32 ; 1.25,14.32 v1(1.25,15.615)
  other v1: 23.5,59.85
+5V_Fused: F1.2 X1.1 X1.5 X2.1 X2.5
  other v1: 23.5,55.65
\EXTMEM: J1.2 U1.26 | length 42.8
  Top Layer w0.23: v1(16.5,28.5) U1.26
  Bottom Layer w0.23: v1(16.5,28.5) 21.25,28.5 22.25,29.5 31.75,29.5 36,25.25 36,13.25 J1.2
AUXVCC: D6.2 H1.1 | length 14.1
  Top Layer w0.5: H1.1 5.48,6.02 6,5.5 6,2 6.75,1.25 11,1.25 11.849,2.099 D6.2
Earth: X1.MH X2.MH X3.MH | length 91.5
  Top Layer w0.5: X1.MH@4.93,48.78 4.93,54.46 18.07,54.46 18.07,48.78 18.075,48.785 28.925,48.785 28.93,48.79 28.93,54.47 42.07,54.47 X2.MH@42.07,48.79 ; v1(18.65,3.38) v1(18.65,8.83) ; X3.MH@18.77,3.5 20.45,3.5 20.9,3.95 X3.MH@20.9,6.25 ; X3.MH@25.3,6.25 25.3,3.95 25.75,3.5 27.43,3.5 v1(27.55,3.38) v1(27.55,8.83)
  Power Layer w0.2: 18.5,1.25 18.65,1.4 ; 27.55,1.45 27.75,1.25 ; 45.04,48.79 45.25,49 ; 45.72,54.47 45.75,54.5
  Power Layer w0.5: 18.65,1.4 v1(18.65,3.38) ; 27.55,1.45 v1(27.55,3.38) ; X2.MH@42.07,48.79 45.04,48.79 ; X2.MH@42.07,54.47 45.72,54.47
EECLK: J3.2 U1.5 | length 34.9
  Top Layer w0.23: U1.5 23.9,20.1 24.915,19.085 27.458,19.085 27.902,19.529 v1(28.029,19.529)
  Bottom Layer w0.23: v1(28.029,19.529) 28.721,19.529 32.25,16 32.25,3.75 34.916,1.084 38.834,1.084 J3.2
EEDATA: J2.2 U1.6 | length 32.6
  Top Layer w0.23: U1.6 24.7,20.05 25.25,19.5 26.909,19.5 27.909,20.5 v1(28,20.5)
  Bottom Layer w0.23: v1(28,20.5) 29.25,20.5 33.5,16.25 33.5,5 34.25,4.25 39,4.25 J2.2
GND: C1.1 C2.1 C3.1 C4.1 C5.1 C6.1 C7.1 C8.1 C9.1 C10.1 C11.1 C12.1 C13.1 C14.1 C15.1 C16.1 C17.1 D1.2 D2.2 D4.2 H1.2 J1.1 M1.5 R1.1 R2.1 R3.1 R4.1 R5.1 R6.1 R7.1 R8.1 TP2.1 U1.7 U1.27 U1.28 U1.31 V1.1 V1.9 X1.4 X1.8 X2.4 X2.8 X3.5 Y1.2 Y1.4 | length 50.3
  Top Layer w0.2: D1.2 3.05,29.2 4.7,29.2 v1(4.75,29.25) ; v1(3.325,38) C1.1 ; R1.1 v1(3.325,45) ; C17.1 5.075,7.825 5.32,7.58 5.67,7.58 v1(5.75,7.5) ; C15.1 v1(7.25,12.75) C16.1 ; v1(7.425,38) C2.1 ; R2.1 v1(7.425,45) ; v1(12.25,22.075) C10.1 ; C9.1 v1(12.25,31.925) ; C3.1 v1(15.325,40.5) ; R3.1 v1(15.325,45) ; v1(17.5,24.25) cw(c17.75,24.25) 17.75,24.5 U1.31 ; U1.28 17.735,26.9 17.385,27.25 v1(17.25,27.25) 17.7,27.7 U1.27 ; C4.1 v1(19.425,40.5) ; R4.1 v1(19.425,45) ; v1(20.65,16) C13.1 ; v1(24.85,16) C14.1 ; R5.1@27.25,43.825 R5.1 ; v1(27.325,38) C5.1 ; R5.1@27.325,43.825 v1(27.325,45) ; v1(31.425,38) C6.1 ; R6.1 v1(31.425,44.925) ; v1(39.325,37.75) C7.1 ; R7.1 v1(39.325,45.25) ; M1.5 v1(43.5,13.595) ; v1(43.425,37.75) C8.1 ; R8.1 v1(43.425,45.25) ; v1(43.5,16) 44.675,16 C12.1
  Top Layer w0.23: X3.5 v1(25.7,8.83) ; U1.7 v1(25.5,24.25) ; C11.1 v1(38.5,22)
  Top Layer w0.5: v1(2.75,18.155) V1.1 ; v1(15.25,14) D2.2
  other v1: 13.45,8.75 7.25,16.25 7.23,24 9.77,30
NetC9_2: C9.2 R17.1 Y1.3 | length 8.6
  Top Layer w0.23: Y1.3 7.23,28.27 7.75,27.75 12.175,27.75 R17.1 C9.2
NetC16_2: C16.2 D3.2 V1.5 V1.6 V1.7 | length 14.5
  Top Layer w0.2: C16.2 12.25,12.75 12.75,13.25 D3.2
  Top Layer w0.5: V1.5 12.6,14.345 12.75,14.495 D3.2 ; V1.6 11.81,15.615 12.75,14.675 12.75,16.25 12.115,16.885 V1.7
NetD1_1: D1.1 R18.2 | length 2.2
  Top Layer w0.2: R18.2 D1.1
NetJ2_1: J2.1 M1.3 R22.2 | length 20.4
  Top Layer w0.23: R22.2 33.03,14.895 36.259,14.895 M1.3 37.885,14.865 39.375,13.375 39.375,12.125 40.5,11 44,11 44.75,10.25 44.75,6.12 44.38,5.75 J2.1
NetJ3_1: J3.1 M1.2 | length 23.1
  Top Layer w0.23: M1.2 38.865,16.135 40.25,14.75 40.25,12.75 41,12 45,12 45.75,11.25 45.75,4 44.5,2.75 J3.1
NetM1_4: M1.4 R22.1 | length 3.3
  Top Layer w0.23: R22.1@33.01,13.585 M1.4@36.279,13.585
USB0_D_N: R20.1 X3.2 | length 5.9
  Top Layer w0.23: R20.1 cw(c22,13.804) 22.521,13.804 22.521,9.051 cw(c22.3,9.051) X3.2
USB0_D_P: R21.1 R23.1 X3.3 | length 7.3
  Top Layer w0.23: X3.3 cw(c23.1,9.051) 22.879,9.051 22.879,13.704 cw(c23.5,13.704) R21.1 R23.1
USB0_DX_N: C13.2 R20.2 U1.2 | length 18.1
  Top Layer w0.23: U1.2 ccw(c21.5,22.041) 21.279,22.041 21.279,20.971 ccw(c21.6,20.971) v1(21.6,20.65) ; R20.2 ccw(c22,16.246) 22.571,16.246 22.571,16.85 ccw(c22.171,16.85) 22.171,17.25 C13.2 22.071,17.25 ccw(c22.071,17.75) 22.571,17.75 22.571,18.179 ccw(c22.25,18.179) v1(22.25,18.5)
  Bottom Layer w0.23: v1(21.6,20.65) cw(c21.6,20.971) 21.279,20.971 21.279,22.041 ccw(c20.7,22.041) 20.7,22.619 19.012,22.619 ccw(c19.012,22.25) 18.643,22.25 18.643,20.5 ccw(c19.5,20.5) 19.5,19.643 22.357,19.643 cw(c22.357,19.5) 22.5,19.5 22.5,18.75 cw(c22.25,18.75) v1(22.25,18.5)
USB0_DX_P: C14.2 R21.2 U1.1 | length 17
  Top Layer w0.23: v1(20.6,20.65) ccw(c20.6,20.971) 20.921,20.971 20.921,22.041 ccw(c20.7,22.041) U1.1 ; v1(23.25,18.5) ccw(c23.25,18.179) 22.929,18.179 22.929,17.75 ccw(c23.429,17.75) 23.429,17.25 C14.2 23.329,17.25 ccw(c23.329,16.85) 22.929,16.85 22.929,16.246 ccw(c23.5,16.246) R21.2
  Bottom Layer w0.23: v1(20.6,20.65) ccw(c20.6,20.971) 20.921,20.971 20.921,22.041 ccw(c20.7,22.041) 20.7,22.262 19.074,22.262 ccw(c19.074,22.032) 19,22.25 19,20.5 ccw(c19.5,20.5) 19.5,20 22.357,20 cw(c22.357,19.5) 22.857,19.5 22.857,18.893 ccw(c23.25,18.893) v1(23.25,18.5)
USB1_D_N: R8.2 R16.2 X2.6 | length 37.3
  Top Layer w0.23: v1@42.054,45.25 ccw(c42.054,44.75) 41.554,44.75 41.554,44.271 ccw(c42.075,44.271) R8.2 ccw(c42.075,43.229) 41.554,43.229 41.554,42.696 ccw(c42.075,42.696) R16.2
  Bottom Layer w0.23: X2.6@36.511,52.01 cw(c36.511,52.76) 35.761,52.76 35.761,56.76 cw(c36.511,56.76) 36.511,57.51 44.011,57.51 cw(c44.011,56.51) 45.011,56.51 45.011,44.26 cw(c44.361,44.26) 44.361,43.61 42.564,43.61 cw(c42.564,44.621) 41.554,44.621 41.554,44.75 cw(c42.054,44.75) 42.054,45.25 v1(42.075,45.25)
USB1_D_P: R7.2 R15.2 X2.7 | length 39.7
  Top Layer w0.23: R15.2 ccw(c40.675,42.696) 41.196,42.696 41.196,43.229 ccw(c40.675,43.229) R7.2 ccw(c40.675,44.271) 41.196,44.271 41.196,44.75 ccw(c40.696,44.75) v1@40.696,45.25
  Bottom Layer w0.23: X2.7@34.511,52.01 ccw(c34.511,52.903) 35.404,52.903 35.404,56.76 cw(c36.511,56.76) 36.511,57.867 44.011,57.867 cw(c44.011,56.51) 45.368,56.51 45.368,44.26 cw(c44.361,44.26) 44.361,43.253 42.416,43.253 cw(c42.416,44.473) 41.196,44.473 41.196,44.75 ccw(c40.696,44.75) 40.696,45.25 v1(40.675,45.25)
USB1_DX_N: C8.2 R16.1 U1.11 | length 29.4
  Top Layer w0.23: U1.11 cw(c27.959,25.3) 27.959,25.522 39.879,25.522 ccw(c39.879,27.196) 41.554,27.196 41.554,38.729 cw(c42.075,38.729) C8.2 cw(c42.075,39.771) 41.554,39.771 41.554,40.304 cw(c42.075,40.304) R16.1
USB1_DX_P: C7.2 R15.1 U1.12 | length 28.9
  Top Layer w0.23: U1.12 ccw(c27.959,26.1) 27.959,25.879 39.879,25.879 ccw(c39.879,27.196) 41.196,27.196 41.196,38.729 ccw(c40.675,38.729) C7.2 ccw(c40.675,39.771) 41.196,39.771 41.196,40.304 ccw(c40.675,40.304) R15.1
USB2_D_N: R6.2 R14.2 X2.2 | length 13.8
  Top Layer w0.23: R14.2 cw(c30.075,42.696) 29.554,42.696 29.554,43.229 cw(c30.075,43.229) R6.2 ; R6.2@30.075,43.76 cw(c30.075,44.281) 29.554,44.281 29.554,45.564 cw(c30,45.564) 30,46.01 34.607,46.01 ccw(c34.607,47.01) 35.607,47.01 35.607,48.247 cw(c36.5,48.247) X2.2
USB2_D_P: R5.2 R13.2 X2.3 | length 13.7
  Top Layer w0.23: R13.2 ccw(c28.675,42.696) 29.196,42.696 29.196,43.229 ccw(c28.675,43.229) R5.2 ; R5.2@28.675,43.76 ccw(c28.675,44.281) 29.196,44.281 29.196,45.564 cw(c30,45.564) 30,46.367 34.607,46.367 ccw(c34.607,47.01) 35.25,47.01 35.25,48.39 ccw(c34.5,48.39) X2.3
USB2_DX_N: C6.2 R14.1 U1.15 | length 20.3
  Top Layer w0.23: U1.15 cw(c27.959,28.5) 27.959,28.722 31.727,28.722 ccw(c31.727,29.852) 32.857,29.852 32.857,32 ccw(c31.857,32) 31.857,33 30.25,33 cw(c30.25,33.696) 29.554,33.696 29.554,38.729 cw(c30.075,38.729) C6.2 ; C6.2@29.804,39.25 C6.2@29.825,39.25 ; C6.2@30.054,39.25 cw(c30.054,39.75) 29.554,39.75 29.554,40.304 cw(c30.075,40.304) R14.1
USB2_DX_P: C5.2 R13.1 U1.16 | length 19.7
  Top Layer w0.23: U1.16 ccw(c27.959,29.3) 27.959,29.079 31.579,29.079 ccw(c31.579,30) 32.5,30 32.5,32 ccw(c31.857,32) 31.857,32.643 30.25,32.643 cw(c30.25,33.696) 29.196,33.696 29.196,38.729 ccw(c28.675,38.729) C5.2 ; C5.2@28.425,39.25 C5.2@28.446,39.25 ; R13.1 cw(c28.675,40.304) 29.196,40.304 29.196,39.75 cw(c28.696,39.75) C5.2@28.696,39.25
USB3_D_N: R4.2 R12.2 X1.6 | length 37.5
  Top Layer w0.23: R12.2 cw(c18.075,42.696) 17.554,42.696 17.554,43.229 cw(c18.075,43.229) R4.2 cw(c18.075,44.271) 17.554,44.271 17.554,44.75 cw(c18.054,44.75) 18.054,45.25 v1(18.075,45.25)
  Bottom Layer w0.23: X1.6@12.5,51.75 cw(c12.5,52.5) 11.75,52.5 11.75,56.5 cw(c12.5,56.5) 12.5,57.25 20,57.25 cw(c20,56.25) 21,56.25 21,44 cw(c20.35,44) 20.35,43.35 18.554,43.35 cw(c18.554,44.35) 17.554,44.35 17.554,44.729 cw(c18.075,44.729) v1(18.075,45.25)
USB3_D_P: R3.2 R11.2 X1.7 | length 39.9
  Top Layer w0.23: R11.2 ccw(c16.675,42.696) 17.196,42.696 17.196,43.229 ccw(c16.675,43.229) R3.2 ccw(c16.675,44.271) 17.196,44.271 17.196,44.75 ccw(c16.696,44.75) 16.696,45.25 v1(16.675,45.25)
  Bottom Layer w0.23: X1.7@10.5,51.75 ccw(c10.5,52.643) 11.393,52.643 11.393,56.5 cw(c12.5,56.5) 12.5,57.607 20,57.607 cw(c20,56.25) 21.357,56.25 21.357,44 cw(c20.35,44) 20.35,42.993 18.554,42.993 cw(c18.554,44.35) 17.196,44.35 17.196,44.729 ccw(c16.675,44.729) v1(16.675,45.25)
USB3_DX_N: C4.2 R12.1 U1.19 | length 17.2
  Top Layer w0.23: R12.1 ccw(c18.075,40.304) 17.554,40.304 17.554,39.771 ccw(c18.075,39.771) C4.2 ccw(c18.075,38.729) 17.554,38.729 17.554,37.946 ccw(c18.25,37.946) 18.25,37.25 23.228,37.25 cw(c23.228,36) 24.478,36 24.478,30.96 ccw(c24.7,30.96) U1.19
USB3_DX_P: C3.2 R11.1 U1.20 | length 17.2
  Top Layer w0.23: R11.1 cw(c16.675,40.304) 17.196,40.304 17.196,39.771 cw(c16.675,39.771) C3.2 cw(c16.675,38.729) 17.196,38.729 17.196,37.946 ccw(c18.25,37.946) 18.25,36.893 23.228,36.893 cw(c23.228,36) 24.121,36 24.121,30.96 cw(c23.9,30.96) U1.20
USB4_D_N: R2.2 R10.2 X1.2 | length 13.8
  Top Layer w0.23: R10.2 cw(c6.075,42.696) 5.554,42.696 5.554,43.229 cw(c6.075,43.229) R2.2 cw(c6.075,44.271) 5.554,44.271 5.554,45.554 cw(c6,45.554) 6,46 10.607,46 ccw(c10.607,47) 11.607,47 11.607,48.237 cw(c12.5,48.237) X1.2@12.5,49.13
USB4_D_P: R1.2 R9.2 X1.3 | length 13.7
  Top Layer w0.23: R9.2 ccw(c4.675,42.696) 5.196,42.696 5.196,43.229 ccw(c4.675,43.229) R1.2 ccw(c4.675,44.271) 5.196,44.271 5.196,45.554 cw(c6,45.554) 6,46.357 10.607,46.357 ccw(c10.607,47) 11.25,47 11.25,48.38 ccw(c10.5,48.38) X1.3@10.5,49.13
USB4_DX_N: C2.2 R10.1 U1.23 | length 25.9
  Top Layer w0.23: R10.1 ccw(c6.075,40.304) 5.554,40.304 5.554,39.771 ccw(c6.075,39.771) C2.2 ccw(c6.075,38.729) 5.554,38.729 5.554,34.946 ccw(c6.5,34.946) 6.5,34 20.107,34 cw(c20.107,32.75) 21.357,32.75 21.357,30.881 ccw(c21.5,30.881) U1.23
USB4_DX_P: C1.2 R9.1 U1.24 | length 26
  Top Layer w0.23: R9.1 cw(c4.675,40.304) 5.196,40.304 5.196,39.771 cw(c4.675,39.771) C1.2 cw(c4.675,38.729) 5.196,38.729 5.196,34.946 ccw(c6.5,34.946) 6.5,33.643 20.107,33.643 cw(c20.107,32.75) 21,32.75 20.985,31.479 ccw(c21.2,31.476) 20.985,31.476 20.985,30.995 cw(c20.754,30.995) 20.885,30.805 U1.24
"USB XTAL 1": C10.2 U1.30 Y1.1 | length 13.7
  Top Layer w0.23: Y1.1 9.77,24.09 10.355,24.675 C10.2 12.275,24.675 12.9,25.3 14.452,25.3 15.047,25.3 cw(c15.047,25.06) 15.288,25.06 15.288,23.55 ccw(c15.528,23.55) 15.528,23.309 ccw(c15.528,23.55) 15.768,23.55 15.768,25.06 cw(c16.008,25.06) 16.008,25.3 18.815,25.3 U1.30
"USB XTAL 2": R17.2 U1.29 | length 7.1
  Top Layer w0.23: R17.2 12.275,26.325 12.5,26.1 U1.29
USB-Reset: C11.2 M1.1 R19.2 TP1.1 U1.4 | length 42.3
  Top Layer w0.23: U1.4 23.1,20.15 24.75,18.5 28.25,18.5 30.25,20.5 R19.2 ; M1.1 36.035,17.405 35.825,17.615 R19.2 ; v1(37.5,24) 36.75,24 35.825,23.075 C11.2 R19.2
  Bottom Layer w0.23: v1(37.5,24) 40.5,24 42.75,26.25 42.75,32.75 41,34.5 TP1.1
USBVCC: D5.2 X3.1 | length 17
  Top Layer w0.5: D5.2 15.5,5.75 16.25,6.5 16.25,11 16.75,11.5 21,11.5 21.5,11 X3.1
pads on no net: J3.3 M1.7 U1.9 U1.13 U1.17 U1.21 U1.32 V1.8 X3.4

## Polygon pours and split planes (outlines as drawn)
+5V_Fused on Power Layer "+5V Fused Power Poly" (solid, remove dead copper, pour order 0): 13.75,57.25 13.75,46.5 40.25,46.5 40.25,57.25
+5V on Power Layer "+5V Power Poly" (solid, remove dead copper, pour order 2): 0,14 2.75,14 2.75,56.75 cw(c4.75,56.75) 4.75,58.75 26,58.75 26,61.25 2,61.25 ccw(c2,59.25) 0,59.25
Earth on Power Layer "Earth Power Poly" (solid, remove dead copper, pour order 3): 0,66 47,66 47,0 0,0 0,2.5 44.5,2.5 44.5,63.5 0,63.5
+3V3 on Power Layer "+3V3 Power Poly" (solid, remove dead copper, pour order 4): 0,66 47,66 47,0 0,0
GND on Ground Layer "GND Poly" (solid, remove dead copper, pour order 5): 0,0 47,0 47,66 0,66
GND on Top Layer "GND Top Poly" (hatched 45Degree grid 0.508 track 0.203, remove dead copper, pour order 6): 0,0 47,0 47,66 0,66
GND on Bottom Layer "GND Bottom Poly" (hatched 45Degree grid 0.508 track 0.203, remove dead copper, pour order 7): 0,0 47,0 47,66 0,66

## Keep-outs
Keep-Out Layer:
  the board outline again, w0.2

## Silkscreen, mask and mechanical layers (free items; w line width, h text height)
Top Overlay:
  region: 41.808,23.852 41.579,23.852 41.579,24.466 42.192,24.466 42.192,24.465 42.193,24.465 42.193,23.852 41.809,23.852
  region: 39.125,27.362 39.125,27.534 39.737,27.534 39.737,27.533 39.738,27.533 39.738,26.921 39.125,26.921 39.125,27.361
  region: 45.261,27.11 45.261,27.533 45.262,27.533 45.262,27.534 45.875,27.534 45.875,26.921 45.261,26.921 45.261,27.109
  region: 43.42,24.417 43.42,23.852 42.806,23.852 42.806,24.465 42.807,24.465 42.807,24.466 43.42,24.466 43.42,24.418
  region: 40.976,28.148 41.579,28.148 41.579,27.534 43.42,27.534 43.42,28.148 44.034,28.148 44.034,26.921 43.42,26.921 43.42,25.693 44.034,25.693 44.034,26.921 45.261,26.921 45.261,26.308 45.26,26.308 45.26,26.307 44.647,26.307 44.647,25.693 45.26,25.693 45.261,25.693 45.261,25.08 45.875,25.08 45.875,23.852 45.261,23.852 45.261,24.466 44.648,24.466 44.648,24.467 44.647,24.467 44.647,25.08 44.034,25.08 44.034,24.467 44.033,24.467 44.033,24.466 43.42,24.466 43.42,25.08 41.579,25.08 41.579,24.466 40.966,24.466 40.966,24.467 40.965,24.467 40.965,25.08 40.352,25.08 40.352,24.467 40.351,24.467 40.351,24.466 39.738,24.466 39.738,23.852 39.125,23.852 39.125,25.08 39.738,25.08 39.738,25.693 39.739,25.693 40.352,25.693 40.352,26.307 39.739,26.307 39.739,26.308 39.738,26.308 39.738,26.921 40.965,26.921 40.965,25.693 41.579,25.693 41.579,26.921 40.965,26.921 40.965,28.148 40.976,28.148
  lines w0.3: 13.875,31.625 17.125,31.625 17.125,33.875 13.875,33.875 13.875,31.625
  text "USB Hub Breakout" at 5.92,35.375 h1.25
  text "RESET" at 31.585,34 h1
  text "V3" at 14.459,32.125 h1.25
  text "PWR" at 1.667,29.95 h1
  text "GND" at 33.584,29.25 h1
  text "Off" at 36.877,10.75 h1
  text "On" at 42.207,10.75 h1
  text "EXTMEM" at 30.295,8.25 h1
  text "+" at 0.917,5.52 h1
  text "DATA" at 32.295,5.25 h1
  text "-" at 0.917,2.98 h1
  text "CLK" at 33.294,2.25 h1
  text "Test" at 1.834,0.75 h1
Bottom Overlay:
  region: 34.348,56.42 33.966,56.42 33.966,57.443 34.987,57.443 34.987,57.442 34.989,57.442 34.989,56.42 34.349,56.42
  region: 29.875,62.27 29.875,62.557 30.896,62.557 30.896,62.555 30.898,62.555 30.898,61.534 29.875,61.534 29.875,62.269
  region: 40.102,61.849 40.102,62.555 40.103,62.555 40.103,62.557 41.125,62.557 41.125,61.534 40.102,61.534 40.102,61.848
  region: 37.034,57.362 37.034,56.42 36.011,56.42 36.011,57.442 36.013,57.442 36.013,57.443 37.034,57.443 37.034,57.363
  region: 32.961,63.579 33.966,63.579 33.966,62.557 37.034,62.557 37.034,63.579 38.057,63.579 38.057,61.534 37.034,61.534 37.034,59.489 38.057,59.489 38.057,61.534 40.102,61.534 40.102,60.513 40.101,60.513 40.101,60.511 39.079,60.511 39.079,59.489 40.101,59.489 40.101,59.487 40.102,59.487 40.102,58.466 41.125,58.466 41.125,56.42 40.102,56.42 40.102,57.443 39.081,57.443 39.081,57.444 39.079,57.444 39.079,58.466 38.057,58.466 38.057,57.444 38.055,57.444 38.055,57.443 37.034,57.443 37.034,58.466 33.966,58.466 33.966,57.443 32.944,57.443 32.944,57.444 32.943,57.444 32.943,58.466 31.92,58.466 31.92,57.444 31.919,57.444 31.919,57.443 30.898,57.443 30.898,56.42 29.875,56.42 29.875,58.466 30.898,58.466 30.898,59.487 30.899,59.487 30.899,59.489 31.92,59.489 31.92,60.511 30.899,60.511 30.899,60.513 30.898,60.513 30.898,61.534 32.943,61.534 32.943,59.489 33.966,59.489 33.966,61.534 32.943,61.534 32.943,63.579 32.96,63.579
  lines w0.254: 26.75,33.508 27.258,33 ; 27.258,34.008 26.75,33.5 34,33.5 34,40.75 34.508,40.242 ; 33.5,40.242 34.008,40.75
  text "Board" at 33.25,36.05 h1.2
  text "Dim" at 33.25,34.25 h1.2
  text "66mm" at 34.75,34 h1.2 r270
  text "47mm" at 33.25,31.55 h1.2
Poly Planning:
  lines w0.2: 0,0 47,0 47,66 0,66 0,63.5 44.5,63.5 44.5,2.5 0,2.5 0,0 ; 0,14 2.75,14 2.75,56.75 cw(c4.75,56.75) 4.75,58.75 26,58.75 26,61.25 2,61.25 ccw(c2,59.25) 0,59.25 0,14 ; 13.75,46.5 40.25,46.5 40.25,57.25 13.75,57.25 13.75,46.5